# Altium PCB TP03PCB2.PcbDoc
Units mm, origin at the board's own origin, x right, y up, seen from the top; angles counter-clockwise.
Board outline 41 x 58.5 mm, 2 copper layers (Top Layer, Bottom Layer); 36 components, 22 nets, 140 pads, 48 vias.
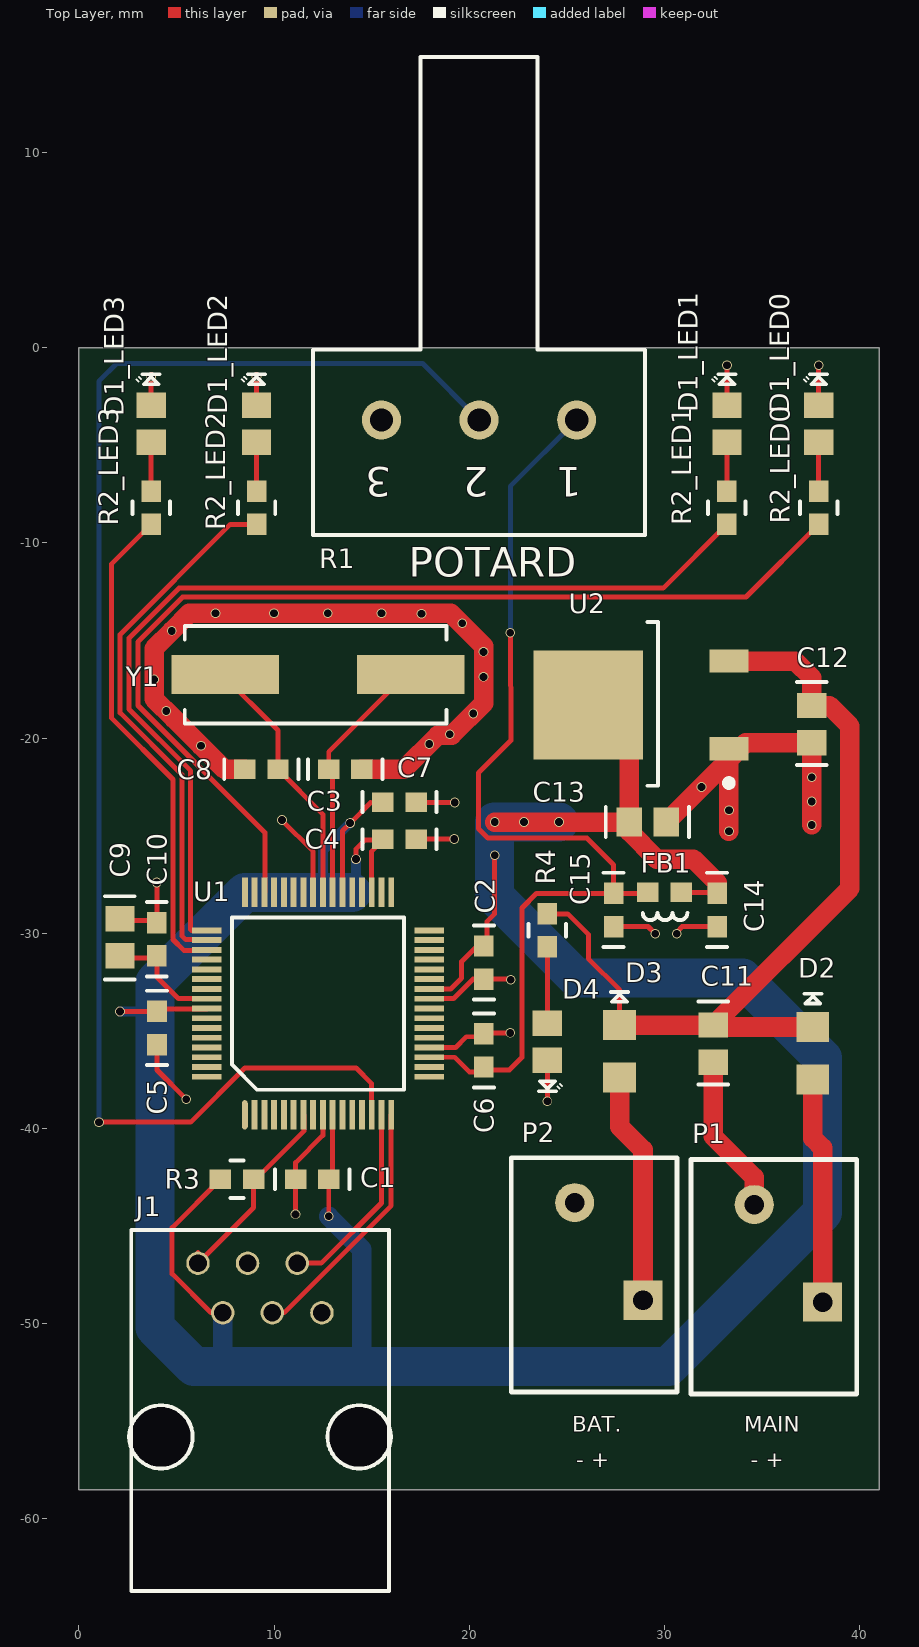
[diagram p0: Top Layer view]
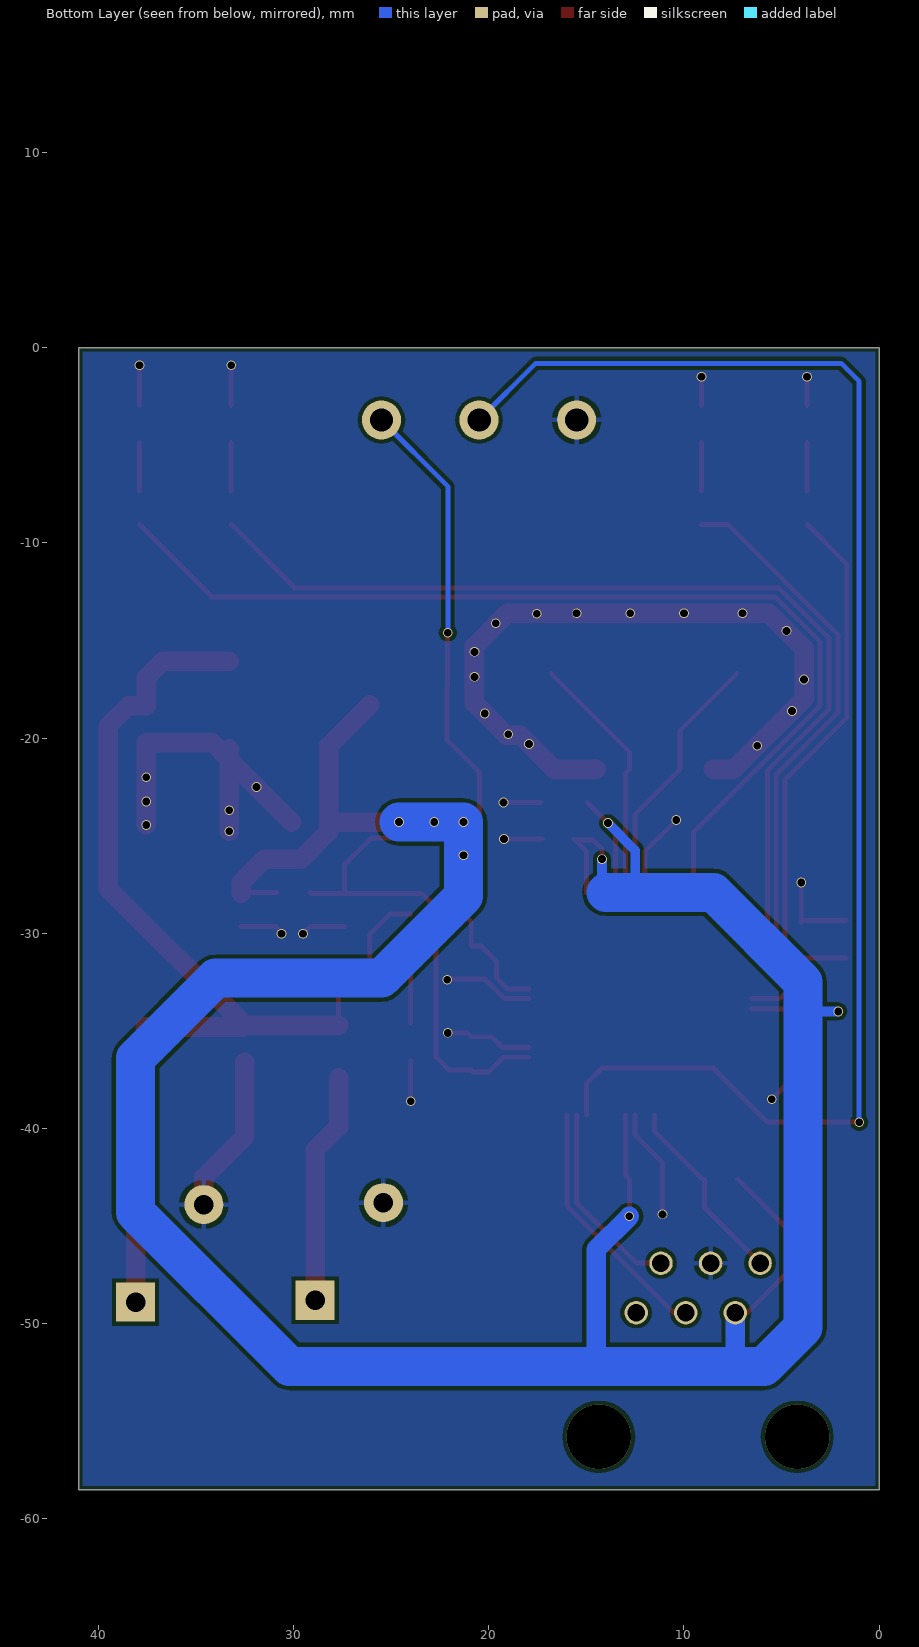
[diagram p1: Bottom Layer view, seen from below]

## Layer stack, top to bottom
Top Solder: solder mask 0.0102, Solder Resist, Dk 3.5
Top Layer: signal copper 0.0356
Dielectric 1: dielectric 0.32, FR-4, Dk 4.8
Bottom Layer: signal copper 0.0356
Bottom Solder: solder mask 0.0102, Solder Resist, Dk 3.5

## Board outline
0,-58.5 41,-58.5 41,0 0,0

## Design rules (kind name [scope] priority, off if disabled: settings)
Clearance [All] p1: gap=0.2
HoleSize [All] p1: absolutevalues=TRUE maxlimit=3.3 minlimit=0.3 maxpercent=80.000 minpercent=20.000
PolygonConnect All [IsVia] p1: connectstyle=Direct reliefconductorwidth=0.254 reliefentries=4 polygonreliefangle="90 Angle" airgapwidth=0.254
PolygonConnect "Via Thermal relief connect" [All] p2: connectstyle=Relief reliefconductorwidth=0.254 reliefentries=4 polygonreliefangle="90 Angle" airgapwidth=0.254
RoutingVias [All] p1: holewidth=0.3 width=0.5 viastyle="Through Hole" minholewidth=0.3 minwidth=0.5 maxholewidth=0.3 maxwidth=0.5
SilkToSolderMaskClearance [IsPad] p1: minsilkscreentomaskgap=0.2 clearancetoexposedcopper=FALSE
SolderMaskExpansion [All] p1: expansion=0.102
UnpouredPolygon [All] p1: allowunpoured=FALSE
Width [All] p1: maxlimit=2 minlimit=0.2 preferedwidth=0.254
27 further rules are at their usual default settings.

## Classes and differential pairs
channel class led: LED0 LED1 LED2 LED3
component class TP2: R1
component class POWER: C11 C12 C13 C14 C15 D2 D3 D4 FB1 P1 P2 R4 U2
component class PIC: C1 C2 C3 C4 C5 C6 C7 C8 C9 C10 J1 R3 U1 Y1
component class LED3: D1_LED3 R2_LED3
component class LED2: D1_LED2 R2_LED2
component class LED1: D1_LED1 R2_LED1
component class LED0: D1_LED0 R2_LED0

## Components (designator, comment, footprint, x,y, rotation, side; value= is the part's Value field where it differs from the comment)
C1 "100nF" CAPC1608N 11.95,-42.6 r0 top
C2 "100nF" CAPC1608N 20.75,-31.5 r90 top
C3 "100nF" CAPC1608N 16.425,-23.275 r180 top
C4 "100nF" CAPC1608N 16.425,-25.175 r180 top
C5 "100nF" CAPC1608N 4,-34.85 r90 top
C6 "100nF" CAPC1608N 20.75,-36 r270 top
C7 "20pF" CAPC1608N 13.65,-21.6 r180 top
C8 "20pF" CAPC1608N 9.35,-21.6 r180 top
C9 "10uF" CAPC2012N 2.1,-30.2 r270 top
C10 "1uF" CAPC1608N 3.992,-30.305 r90 top
C11 "10uF" CAPC2012N 32.5,-35.65 r90 top
C12 "10uF" CAPC2012N 37.546,-19.281 r90 top
C13 "10uF" CAPC2012N 29.15,-24.3 r180 top
C14 "1uF" CAPC1608N 32.692,-28.805 r90 top
C15 "100nF" CAPC1608N 27.392,-28.805 r90 top
D1_LED0 "Green LED" "LED 0805" 37.9,-3.9 r90 top (schematic designator D1)
D1_LED1 "Green LED" "LED 0805" 33.2,-3.9 r90 top (schematic designator D1)
D1_LED2 "Green LED" "LED 0805" 9.1,-3.9 r90 top (schematic designator D1)
D1_LED3 "Green LED" "LED 0805" 3.7,-3.9 r90 top (schematic designator D1)
D2 "GF1A" SMA/DO-214AC_21 37.6,-36.145 r90 top
D3 "GF1A" SMA/DO-214AC_21 27.7,-36.045 r90 top
D4 "Green LED" "LED 0805" 24,-35.55 r270 top
FB1 "600r" INDC1608AN 30.003,-27.898 r180 top
J1 "Program / Debug" RJ12_90 15.88,-45.2 r270 top
P1 "MAIN" PHOENIX_1985195 34.6,-43.9 r0 top
P2 "BAT." PHOENIX_1985195 25.4,-43.8 r0 top
R1 "1K" PDB181-K415K-102A2 25.5,-3.7 r180 top
R2_LED0 "330r" RESC1608N 37.9,-8.2 r270 top (schematic designator R2)
R2_LED1 "330r" RESC1608N 33.2,-8.2 r270 top (schematic designator R2)
R2_LED2 "330r" RESC1608N 9.1,-8.2 r270 top (schematic designator R2)
R2_LED3 "330r" RESC1608N 3.7,-8.2 r270 top (schematic designator R2)
R3 "4.7k" RESC1608N 8.1,-42.6 r180 top
R4 "470r" RESC1608N 24,-29.85 r90 top
U1 "PIC32MX764F128H-I/PT" QFP50P1200X1200X120-64 8.5,-39.3 r90 top
U2 "AP1117" TD03B_N 33.3,-16.05 r90 top
Y1 "8MHz" "HC49/4H SMX CRYSTAL" 12.25,-16.75 r0 top

## Footprints (in the part's own frame and the unit in brackets; to place one, negate y for a bottom-side part, rotate by r counter-clockwise, add the part's x,y. Pads: shape width x height; smd on the part's side, far side on the other; paste and mask are expansions set on the pad)
CAPC1608N [mm]
  rect 1.1x1 smd: 1(-0.85,0) 2(0.85,0)
  silkscreen extent -1.9,-0.51 1.91,0.51
CAPC2012N [mm]
  rect 1.3x1.5 smd: 1(-0.95,0) 2(0.95,0)
  silkscreen extent -2.1,-0.76 2.16,0.76
"HC49/4H SMX CRYSTAL" [mm]
  rect 5.5x2 smd: 1(-4.75,0) 2(4.75,0)
  silkscreen extent -6.83,-2.5 6.57,2.5
INDC1608AN [mm]
  rect 1.1x1 smd: 1(-0.85,0) 2(0.85,0)
  silkscreen extent -1.17,1.05 1.12,1.43
"LED 0805" [mm]
  rect 1.3x1.5 smd: 1(-0.95,0) 2(0.95,0)
  silkscreen extent 2.03,-0.43 2.54,0.76
PDB181-K415K-102A2 [mm]
  round 2 hole 1.2: 1(0,0) 2(5,0) 3(10,0)
  silkscreen extent -3.5,-18.6 13.5,5.9
PHOENIX_1985195 [mm]
  rect 2x2 hole 1: 1(3.5,-5)
  round 2 hole 1: 2(0,0)
  silkscreen extent -3.25,-9.7 5.25,2.3
QFP50P1200X1200X120-64 [mm]
  oval 1.5x0.3 smd: 1(0,0)
  rect 1.5x0.3 smd: 2(0,-0.5) 3(0,-1) 4(0,-1.5) 5(0,-2) 6(0,-2.5) 7(0,-3) 8(0,-3.5) 9(0,-4) 10(0,-4.5) 11(0,-5) 12(0,-5.5) 13(0,-6) 14(0,-6.5) 15(0,-7) 16(0,-7.5) 33(11.4,-7.5) 34(11.4,-7) 35(11.4,-6.5) 36(11.4,-6) 37(11.4,-5.5) 38(11.4,-5) 39(11.4,-4.5) 40(11.4,-4) 41(11.4,-3.5) 42(11.4,-3) 43(11.4,-2.5) 44(11.4,-2) 45(11.4,-1.5) 46(11.4,-1) 47(11.4,-0.5) 48(11.4,0)
  rect 0.3x1.5 smd: 17(1.95,-9.45) 18(2.45,-9.45) 19(2.95,-9.45) 20(3.45,-9.45) 21(3.95,-9.45) 22(4.45,-9.45) 23(4.95,-9.45) 24(5.45,-9.45) 25(5.95,-9.45) 26(6.45,-9.45) 27(6.95,-9.45) 28(7.45,-9.45) 29(7.95,-9.45) 30(8.45,-9.45) 31(8.95,-9.45) 32(9.45,-9.45) 49(9.45,1.95) 50(8.95,1.95) 51(8.45,1.95) 52(7.95,1.95) 53(7.45,1.95) 54(6.95,1.95) 55(6.45,1.95) 56(5.95,1.95) 57(5.45,1.95) 58(4.95,1.95) 59(4.45,1.95) 60(3.95,1.95) 61(3.45,1.95) 62(2.95,1.95) 63(2.45,1.95) 64(1.95,1.95)
  silkscreen extent 1.28,-8.16 10.11,0.67
RESC1608N [mm]
  rect 1.1x1 smd: 1(-0.85,0) 2(0.85,0)
  silkscreen extent -0.33,-0.96 0.33,0.96
RJ12_90 [mm]
  round 1.2 hole 0.9: 1(1.7,-9.78) 2(4.24,-8.51) 3(1.7,-7.24) 4(4.24,-5.97) 5(1.7,-4.7) 6(4.24,-3.43)
  silkscreen extent 0,-13.31 18.5,0.11
SMA/DO-214AC_21 [mm]
  rect 1.52x1.68 smd: 1(-1.345,0) 2(1.345,0)
  silkscreen extent 2.54,-0.43 3.05,0.43
TD03B_N [mm]
  rect 1.2x2 smd: 1(-4.5,0) 3(0,0)
  rect 5.6x5.6 smd: 4(-2.25,7.2)
  silkscreen extent -6.39,-0.1 1.99,4.17

## Part data
C1 C2 C3 C4 C5 C6 C7 C8 C9 C10 C11 C12 C13 C14 C15: library part Cap, "Capacitor"
D1_LED0 D1_LED1 D1_LED2 D1_LED3 D4: library part LED2, "Typical INFRARED GaAs LED"
D2 D3: library part Diode, "Default Diode"
FB1: library part Inductor, "Inductor"
J1: "RJ11"
P1 P2: library part "Header 2", "Header, 2-Pin"
R1: library part RPot, "Potentiometer"
R2_LED0 R2_LED1 R2_LED2 R2_LED3 R3 R4: library part Res1, "Resistor"
U1: library part PIC, "PIC32MX764F128H"
Y1: library part XTAL, "Crystal Oscillator"

## Via types
v1: diameter 0.5, hole 0.4, Top Layer to Bottom Layer, 46 vias
v2: diameter 3.3, hole 3.3, Top Layer to Bottom Layer, 2 vias

## Nets (pads, with @x,y where several pads share a name; then routed paths per layer and width w, separated by ;. In a path a pad name is that pad's centre, name@x,y a point inside that pad or via, vN(x,y) a via of type N, cw(c..) or ccw(c..) an arc to the next point about the centre after c; other vN are vias at no path point)
ALIM: D2.1 P1.1 | length 11.6
  Top Layer w1: D2.1 37.6,-40.5 38.1,-41 P1.1
BATTERY: D3.1 P2.1 | length 11.9
  Top Layer w1: D3.1 27.7,-39.9 28.9,-41.1 P2.1
GND: C1.1 C2.1 C3.1 C4.1 C5.1 C6.1 C7.1 C8.2 C9.1 C10.2 C11.1 C12.1 C13.1 C14.1 C15.1 D1_LED0.2 D1_LED1.2 D1_LED2.2 D1_LED3.2 D4.2 J1.3 P1.2 P2.2 R1.3 U1.9 U1.20 U1.25 U1.41 U2.1 | length 107.9
  Top Layer w0.254: C9.1@1.692,-29.355 3.892,-29.355 C10.2 v1(3.992,-27.4) ; D1_LED3.2 v1(3.7,-1.487) ; C5.1 4,-37 v1(5.5,-38.5) ; D1_LED2.2 v1(9.1,-1.487) ; v1(10.4,-24.2) 12,-25.8 U1.41 ; v1(11.1,-44.4) C1.1 11.1,-41.75 12.5,-40.35 U1.9 ; C4.1 v1(19.225,-25.175) ; C3.1@17.325,-23.3 v1(19.25,-23.3) ; U1.20 19.3,-35.85 19.85,-35.3 20.9,-35.3 21.1,-35.1 v1(22.1,-35.1) ; U1.25 19.192,-33.35 20.192,-32.35 22.1,-32.35 v1(22.125,-32.375) ; v1(24,-38.6) D4.2 ; C15.1 29.153,-29.655 v1(29.525,-30.027) ; v1(30.625,-30.027) 30.625,-29.938 30.908,-29.655 C14.1 ; D1_LED1.2 v1(33.2,-0.9) ; D1_LED0.2 v1(37.9,-0.9)
  Top Layer w1: C8.2 7.46,-21.6 v1(6.25,-20.39) 4.86,-19 3.85,-17.99 v1(3.85,-17) 3.85,-15.41 v1(4.755,-14.505) 5.66,-13.6 v1(7,-13.6) v1(10,-13.6) v1(12.75,-13.6) v1(15.5,-13.6) 19.042,-13.6 20.743,-15.302 20.743,-18.207 19.097,-19.854 18.386,-19.854 16.64,-21.6 C7.1 ; C13.1 U2.1@33.3,-21.1 ; C11.1 32.5,-40.4 34.6,-42.5 P1.2 ; v1(33.3,-24.775) U2.1@33.3,-21.1 ; U2.1 U2.1@33.3,-21.1 ; v1(37.546,-24.446) v1(37.546,-23.25) v1(37.546,-22) C12.1 34.169,-20.231 U2.1@33.3,-21.1
  other v1: 33.3,-23.7 31.9,-22.5 17.945,-20.306 19,-19.8 20.205,-18.735 4.471,-18.616 20.73,-16.861 20.73,-15.58 19.643,-14.117 17.545,-13.632
LED0: R2_LED0.2 U1.46 | length 52.9
  Top Layer w0.254: U1.46 9.523,-27.877 9.523,-24.833 3.023,-18.333 3.023,-15.067 5.317,-12.773 34.177,-12.773 R2_LED0.2
LED1: R2_LED1.2 U1.49 | length 50.1
  Top Layer w0.254: U1.49 5.769,-29.85 5.727,-29.808 5.727,-21.679 2.569,-18.521 2.569,-14.879 5.129,-12.319 29.931,-12.319 R2_LED1.2
LED2: R2_LED2.2 U1.50 | length 27.4
  Top Layer w0.254: U1.50 6.527,-30.327 5.473,-30.327 5.273,-30.127 5.273,-21.867 2.115,-18.709 2.115,-14.691 7.756,-9.05 R2_LED2.2
LED3: R2_LED3.2 U1.51 | length 25.4
  Top Layer w0.254: R2_LED3.2 1.661,-11.089 1.661,-18.961 4.819,-22.119 4.819,-30.315 5.377,-30.873 6.55,-30.873 U1.51
MCLR: J1.1 R3.1 U1.7 | length 10.5
  Top Layer w0.254: J1.1@6.1,-46.35 J1.1 8.95,-44.05 R3.1 9.062,-42.6 11.523,-40.139 11.523,-39.323 U1.7
NetC9_2: C9.2 C10.1 U1.56 | length 6.4
  Top Layer w0.254: C9.2@1.692,-31.255 3.892,-31.255 C10.1 3.992,-32.242 5.1,-33.35 U1.56
NetD1_LED0_1: D1_LED0.1 R2_LED0.1 | length 2.5
  Top Layer w0.254: R2_LED0.1 D1_LED0.1
NetD1_LED1_1: D1_LED1.1 R2_LED1.1 | length 2.5
  Top Layer w0.254: R2_LED1.1 D1_LED1.1
NetD1_LED2_1: D1_LED2.1 R2_LED2.1 | length 2.5
  Top Layer w0.254: R2_LED2.1 D1_LED2.1
NetD1_LED3_1: D1_LED3.1 R2_LED3.1 | length 2.5
  Top Layer w0.254: R2_LED3.1 D1_LED3.1
NetD4_1: D4.1 R4.1 | length 3.9
  Top Layer w0.254: D4.1 R4.1
NetR1_2: R1.2 U1.14 | length 76.1
  Top Layer w0.254: v1(1.024,-39.676) 5.724,-39.676 8.5,-36.9 14.2,-36.9 15,-37.7 U1.14
  Bottom Layer w0.254: v1(1.024,-39.676) 1.024,-1.724 1.948,-0.8 17.6,-0.8 R1.2
PGC: J1.5 U1.15 | length 10.1
  Top Layer w0.254: J1.5 12.415,-46.9 15.5,-43.815 U1.15
PGD: J1.4 U1.16 | length 13
  Top Layer w0.254: J1.4 10.517,-49.44 16,-43.957 U1.16
V3P3: C1.2 C2.2 C3.2 C4.2 C5.2 C13.2 C14.2 FB1.1 J1.2 R3.2 U1.10 U1.26 U1.35 U1.38 U1.57 U2.4 | length 183
  Top Layer w0.254: v1(2.1,-34) C5.2 4,-33.873 6.527,-33.873 U1.57 ; R3.2 4.773,-45.077 4.773,-47.45 6.763,-49.44 J1.2 ; v1(12.8,-44.5) C1.2 13,-42.4 U1.10 ; U1.38 13.5,-24.75 v1(13.895,-24.355) 14.95,-23.3 ; v1(14.2,-26.2) 14.2,-25.675 14.65,-25.225 C4.2@15.55,-25.225 ; U1.35 15,-25.8 C4.2@15.625,-25.175 ; U1.26 19.05,-32.85 19.6,-32.3 19.6,-31.45 20.4,-30.65 20.9,-30.65 20.9,-29.4 21.3,-29 v1(21.3,-26) ; FB1.1 C14.2@32.635,-27.898
  Top Layer w1: v1(21.3,-24.3) v1(22.8,-24.3) v1(24.6,-24.3) C13.2 ; U2.4 28.2,-20.4 C13.2 ; C14.2 32.692,-27.408 31.484,-26.2 29.6,-26.2 29.6,-26.19 28.2,-24.79 C13.2
  Bottom Layer w0.254: 13.8,-27.7 14,-27.9
  Bottom Layer w0.5: v1(2.1,-34) 3.9,-34 ; 12.5,-27.9 12.5,-25.75 v1(13.895,-24.355) ; 13.8,-27.7 14.2,-27.3 v1(14.2,-26.2)
  Bottom Layer w1: 7.37,-52.2 J1.2 ; v1(12.8,-44.5) 14.5,-46.2 14.5,-52.2
  Bottom Layer w2: 14,-27.9 12.5,-27.9 8.5,-27.9 3.9,-32.5 3.9,-34 3.9,-50.2 5.9,-52.2 7.37,-52.2 14.5,-52.2 30.2,-52.2 38.1,-44.3 38.1,-36.4 34,-32.3 25.5,-32.3 21.3,-28.1 v1(21.3,-24.3) v1(22.8,-24.3) v1(24.6,-24.3)
V3P3A: C6.2 C15.2 FB1.2 R1.1 U1.19 | length 52.3
  Top Layer w0.254: U1.19 19.25,-36.35 20,-37.1 20.8,-37.1 20.9,-37 22.05,-37 22.7,-36.35 22.702,-36.352 22.702,-32.136 22.7,-32.134 22.7,-28.7 23.445,-27.955 C15.2 ; FB1.2 29.096,-27.955 C15.2 ; v1(22.1,-14.6) 22,-14.6 22.1,-14.5 v1(22.1,-14.6) ; v1(22.1,-14.6) 22.111,-14.611 22.137,-20.117 20.473,-21.782 20.473,-24.643 20.957,-25.127 26.027,-25.127 27.392,-26.492 C15.2
  Bottom Layer w0.254: v1(22.1,-14.6) 22.1,-7.1 R1.1
V5: C11.2 C12.2 D2.2 D3.2 R4.2 U2.3 | length 44.4
  Top Layer w0.254: R4.2 25.045,-29 26.1,-30.055 26.1,-31.3 27.7,-32.9 D3.2
  Top Layer w0.5: C11.2 C11.2@32.6,-34.8
  Top Layer w1: D3.2 C11.2 39.5,-27.7 39.5,-19.385 38.446,-18.331 C12.2 37.546,-16.9 36.696,-16.05 U2.3 ; C11.2@32.6,-34.8 D2.2
X1: C7.2 U1.39 Y1.2 | length 12.9
  Top Layer w0.254: U1.39 13,-21.8 C7.2 12.8,-20.7 Y1.2@16.8,-16.7
X2: C8.1 U1.40 Y1.1 | length 13.4
  Top Layer w0.254: Y1.1@7.3,-16.7 10.2,-19.6 C8.1 12.5,-23.9 U1.40
pads on no net: J1.6 U1.1 U1.2 U1.3 U1.4 U1.5 U1.6 U1.8 U1.11 U1.12 U1.13 U1.17 U1.18 U1.21 U1.22 U1.23 U1.24 U1.27 U1.28 U1.29 U1.30 U1.31 U1.32 U1.33 U1.34 U1.36 U1.37 U1.42 U1.43 U1.44 U1.45 U1.47 U1.48 U1.52 U1.53 U1.54 U1.55 U1.58 U1.59 U1.60 U1.61 U1.62 U1.63 U1.64
copper on no net:
  other v2: 4.2,-55.8 14.36,-55.8

## Polygon pours and split planes (outlines as drawn)
GND on Bottom Layer "gnd plan" (solid, remove dead copper, pour order 3): 0.2,-0.2 40.8,-0.2 40.8,-58.3 0.2,-58.3

## Silkscreen, mask and mechanical layers (free items; w line width, h text height)
Top Overlay:
  text "POTARD" at 16.911,-11.72 h1.52
  text "- +" at 25.471,-57.361 h0.8
  text "- +" at 34.431,-57.361 h0.8
Drill Drawing:
  circle w0.254: c53.165,-37.472 r0.635
  lines w0.254: 52.53,-53.03 52.848,-53.03 52.848,-53.347 53.483,-53.347 53.483,-53.03 53.8,-53.03 53.8,-52.395 53.483,-52.395 53.483,-52.077 52.848,-52.077 52.848,-52.395 52.53,-52.395 52.53,-53.03 ; 52.53,-49.537 53.8,-49.537 53.8,-48.267 52.53,-48.267 52.53,-49.537 ; 52.53,-45.41 52.848,-45.41 53.165,-45.727 53.483,-45.41 53.8,-45.41 53.483,-45.092 53.8,-44.775 53.483,-44.775 53.165,-44.457 52.848,-44.775 52.53,-44.775 52.848,-45.092 52.53,-45.41 ; 52.53,-41.917 53.165,-41.6 53.8,-41.917 53.483,-41.282 53.8,-40.647 53.165,-40.965 52.53,-40.647 52.848,-41.282 52.53,-41.917
  lines w0.381: 50.8,-54.49 149.326,-54.49 ; 50.8,-35.44 149.326,-35.44 ; 64.792,-58.3 64.792,-31.63 ; 82.517,-58.3 82.517,-31.63 ; 116.695,-58.3 116.695,-31.63 ; 129.544,-58.3 129.544,-31.63 ; 50.8,-58.3 149.326,-58.3 149.326,-31.63 50.8,-31.63 50.8,-58.3
  text "Symbol" at 53.086,-34.297 h1.83
  text "Hit Count" at 65.935,-34.297 h1.83
  text "Finished Hole Size" at 83.66,-34.297 h1.83
  text "Plated" at 117.838,-34.297 h1.83
  text "Hole Type" at 130.687,-34.297 h1.83
  text "2" at 65.935,-38.107 h1.52
  text "3.300mm (129.92mil)" at 83.66,-38.107 h1.52
  text "PTH" at 117.838,-38.107 h1.52
  text "Round" at 130.687,-38.107 h1.52
  text "3" at 65.935,-41.917 h1.52
  text "1.200mm (47.24mil)" at 83.66,-41.917 h1.52
  text "PTH" at 117.838,-41.917 h1.52
  text "Round" at 130.687,-41.917 h1.52
  text "4" at 65.935,-45.727 h1.52
  text "1.000mm (39.37mil)" at 83.66,-45.727 h1.52
  text "PTH" at 117.838,-45.727 h1.52
  text "Round" at 130.687,-45.727 h1.52
  text "6" at 65.935,-49.537 h1.52
  text "0.900mm (35.43mil)" at 83.66,-49.537 h1.52
  text "PTH" at 117.838,-49.537 h1.52
  text "Round" at 130.687,-49.537 h1.52
  text "46" at 65.935,-53.347 h1.52
  text "0.400mm (15.75mil)" at 83.66,-53.347 h1.52
  text "PTH" at 117.838,-53.347 h1.52
  text "Round" at 130.687,-53.347 h1.52
  text "61 Total" at 65.935,-57.157 h1.52
Board outline:
  lines w0.254: 0,-58.5 41,-58.5 ; 0,-58.5 0,-58.5 ; 0,-58.5 0,0 41,0 ; 41,-58.5 41,0 ; 41,-58.5 41,-58.5 ; 41,0 41,0

## Dimensions
0,-58.5 to 41,-58.5 on Dimensions
0,0 to 0,-58.5 on Dimensions

## Text inside footprints (layer, text, board x,y; h text height)
R1: Top Overlay "3" at 16.008,-6.123 h1.52 r180; Top Overlay "2" at 21.008,-6.123 h1.52 r180; Top Overlay "1" at 25.754,-6.123 h1.52 r180